# Altium PCB servo.PcbDoc
Units mil, origin at the board's own origin, x right, y up, seen from the top; angles counter-clockwise.
Board outline 1401.57 x 1050 mil, 4 copper layers (Top, Layer 2, Layer 3, Bottom), stack 23.712 mil thick; 86 components, 40 nets, 237 pads, 71 vias.
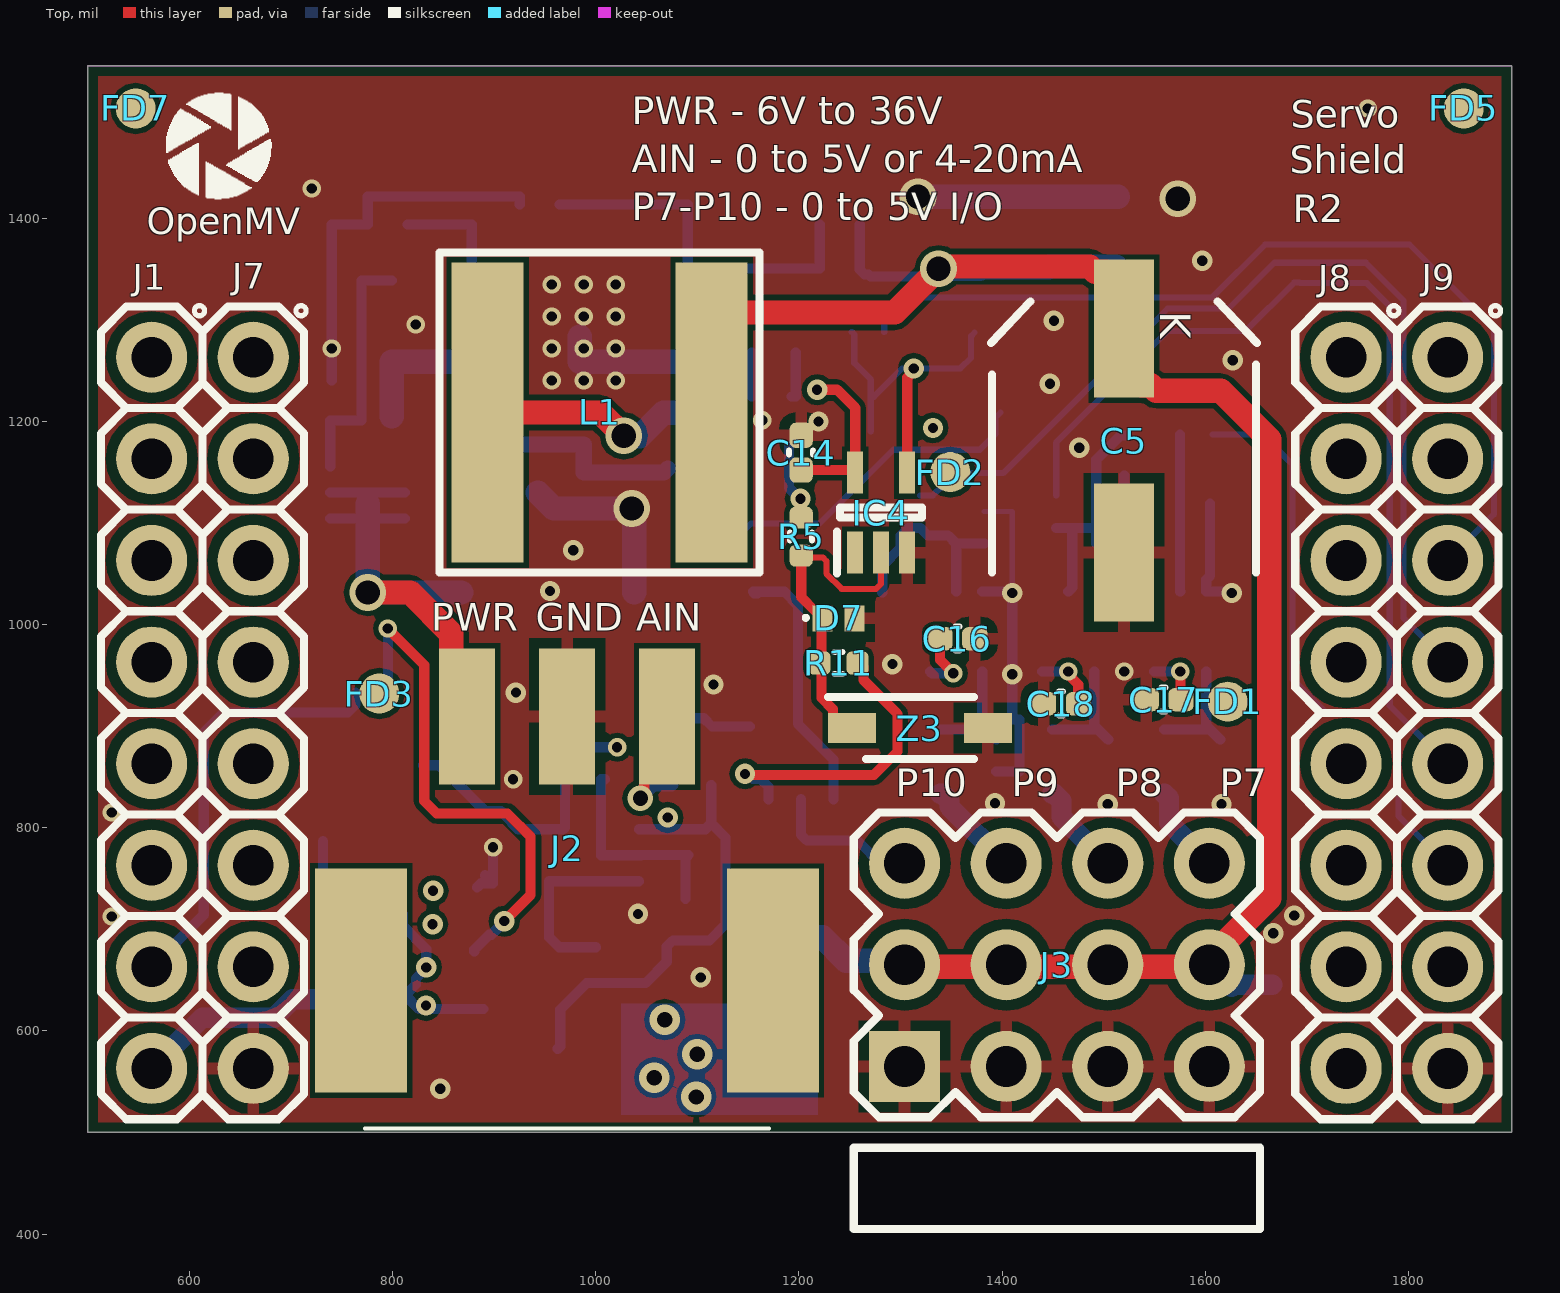
[diagram p0: Top view]
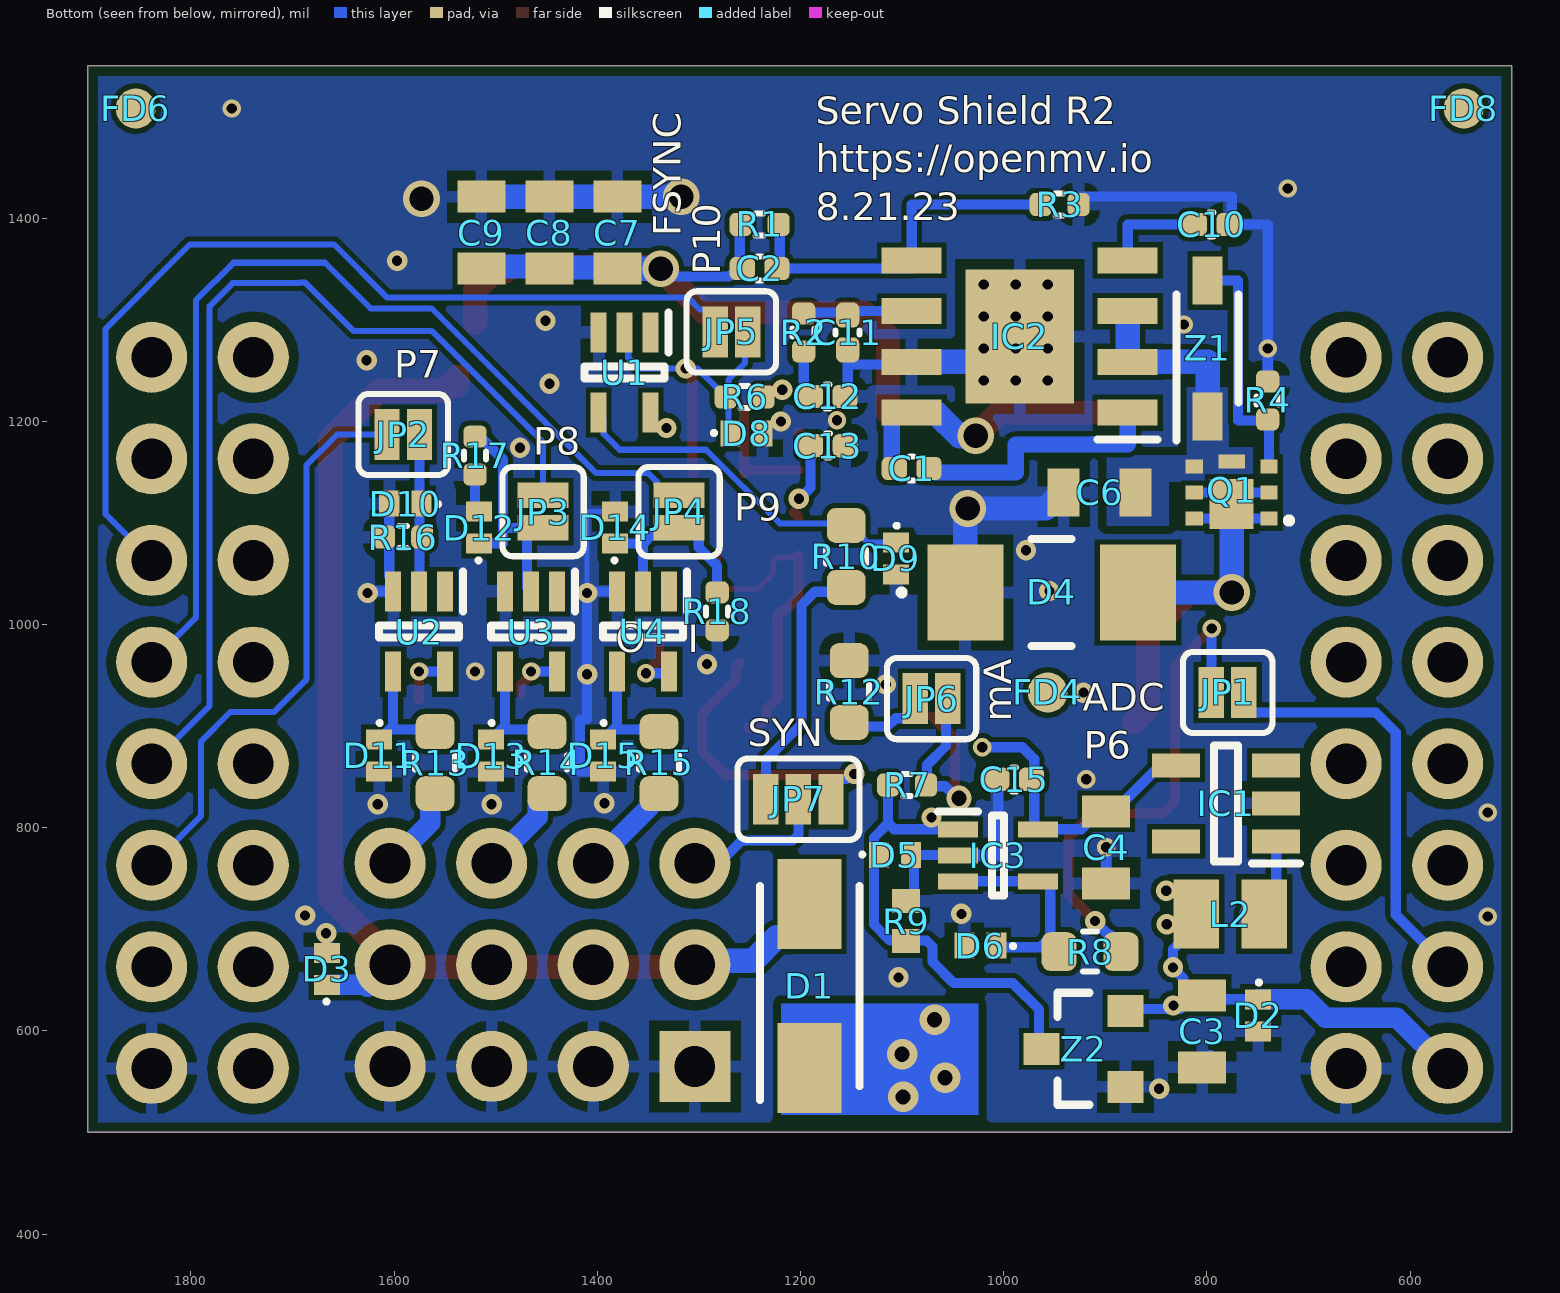
[diagram p1: Bottom view, seen from below]
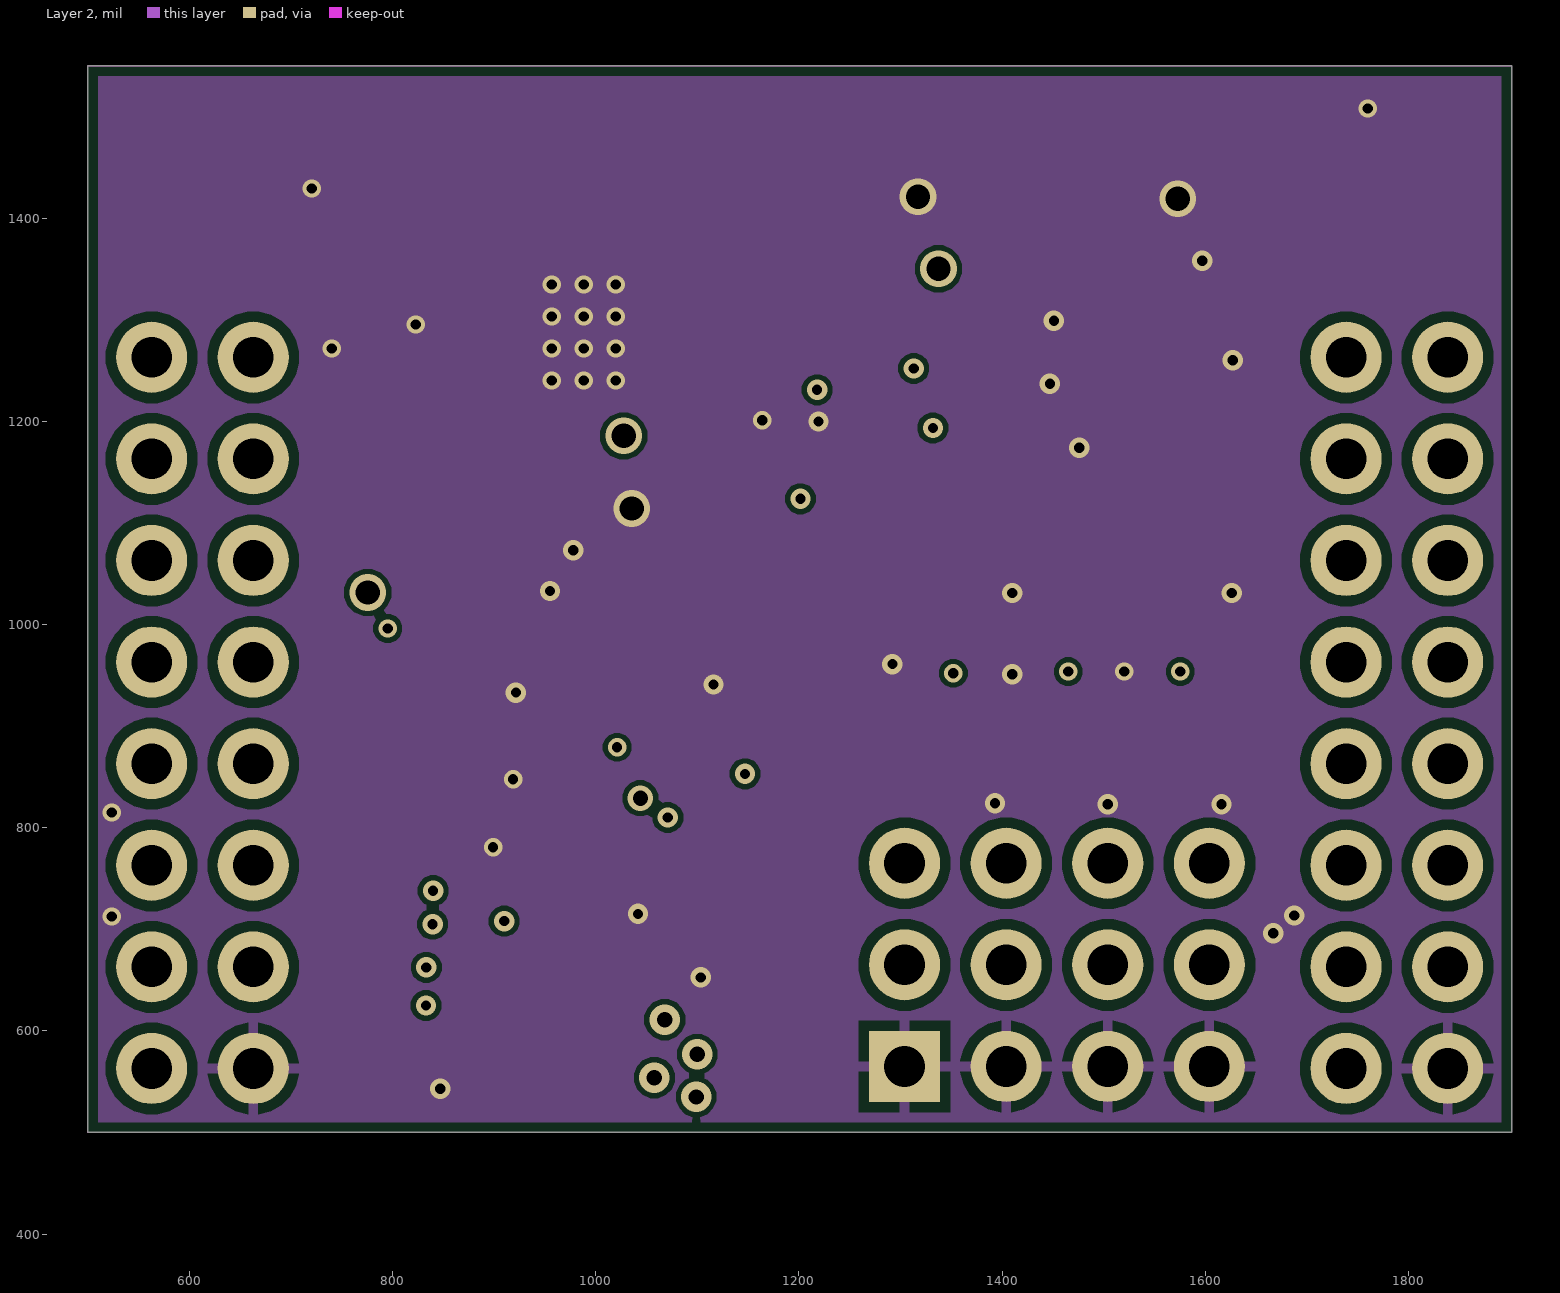
[diagram p2: Layer 2]
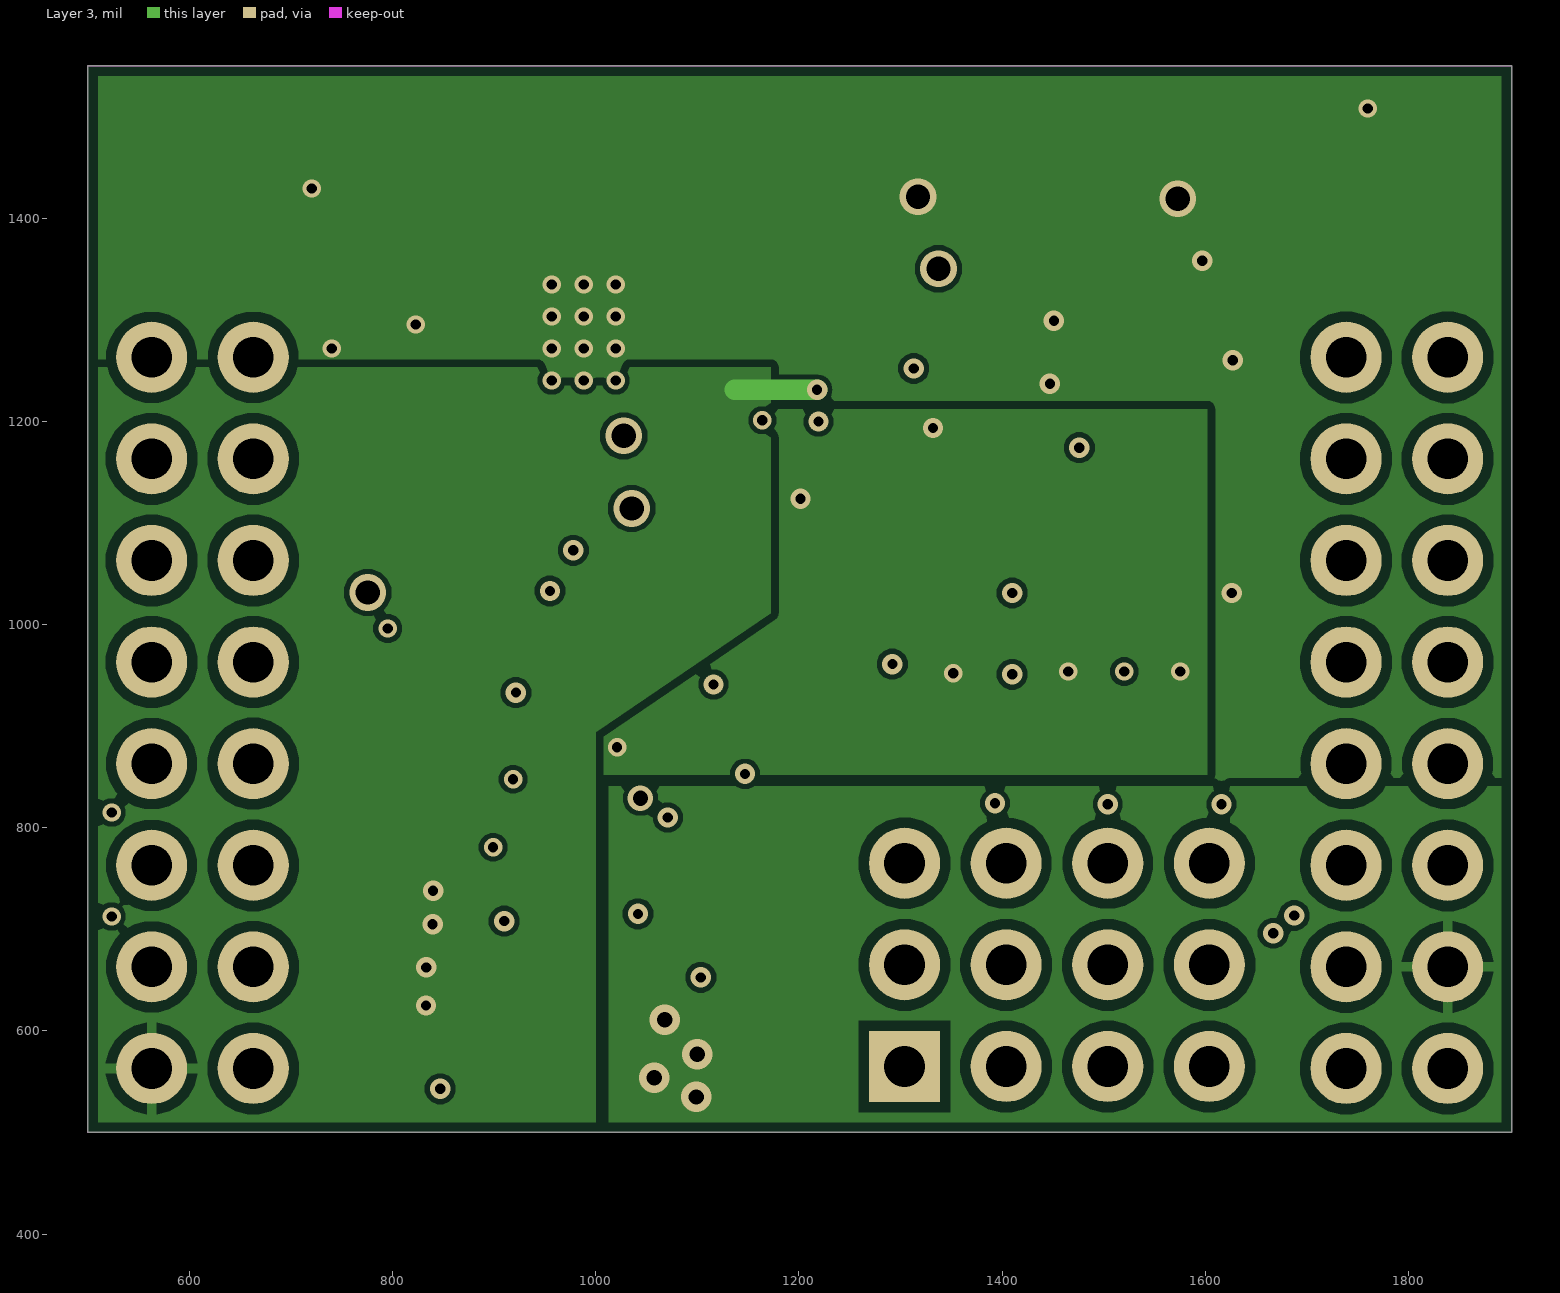
[diagram p3: Layer 3]
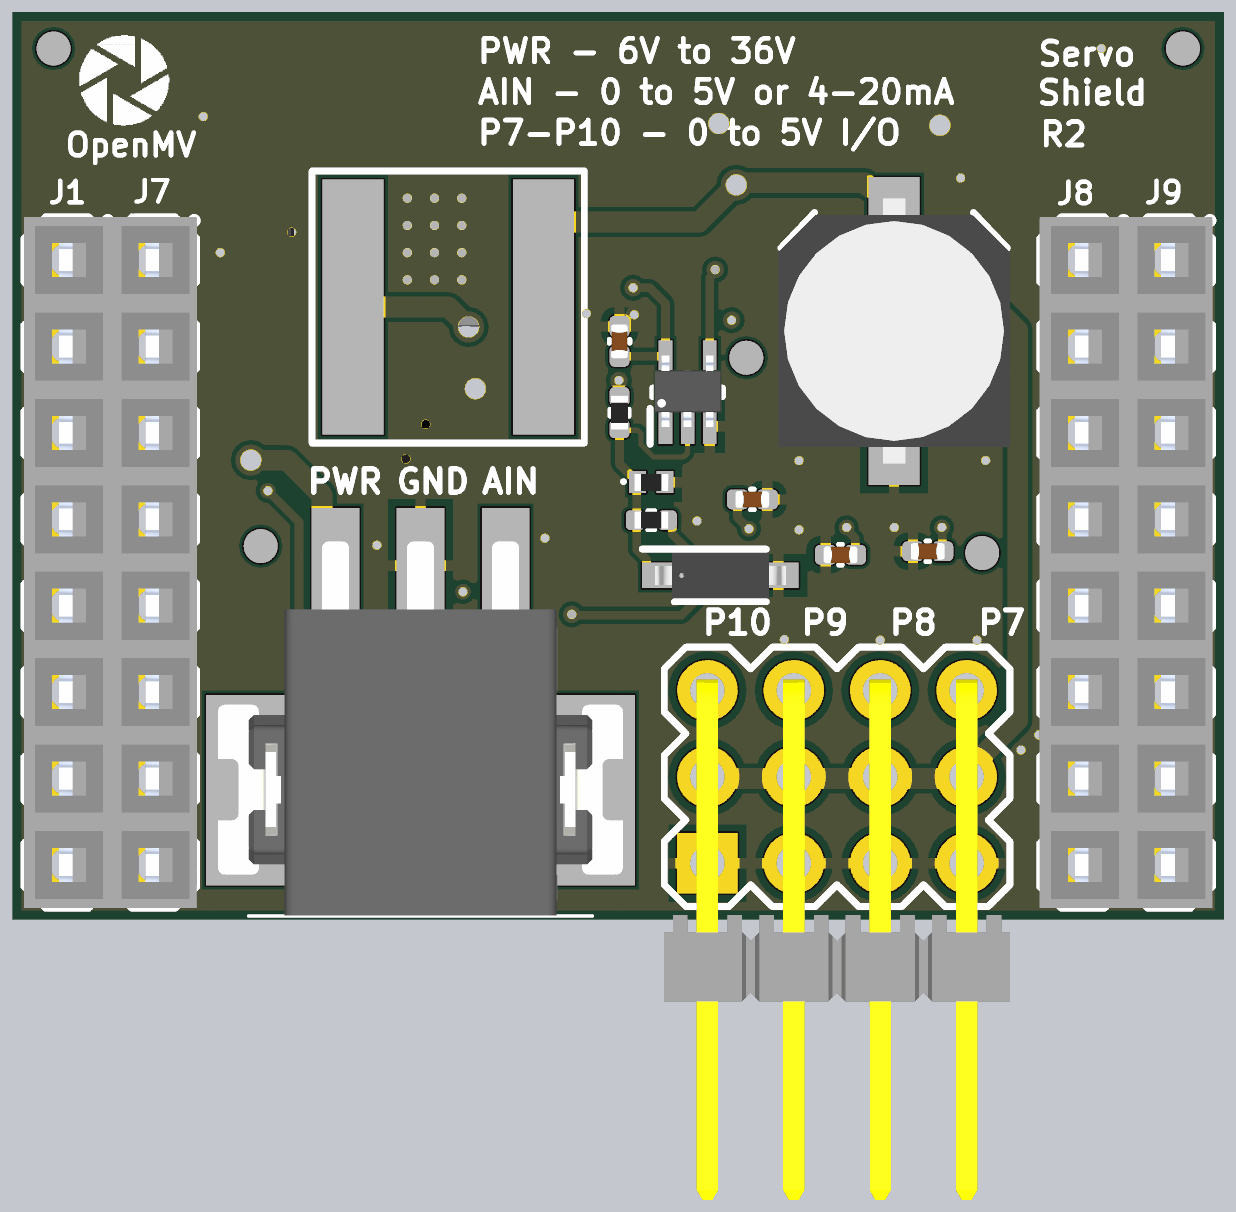
[diagram p4: 3D render of the assembled board from above, using the file's embedded part models]
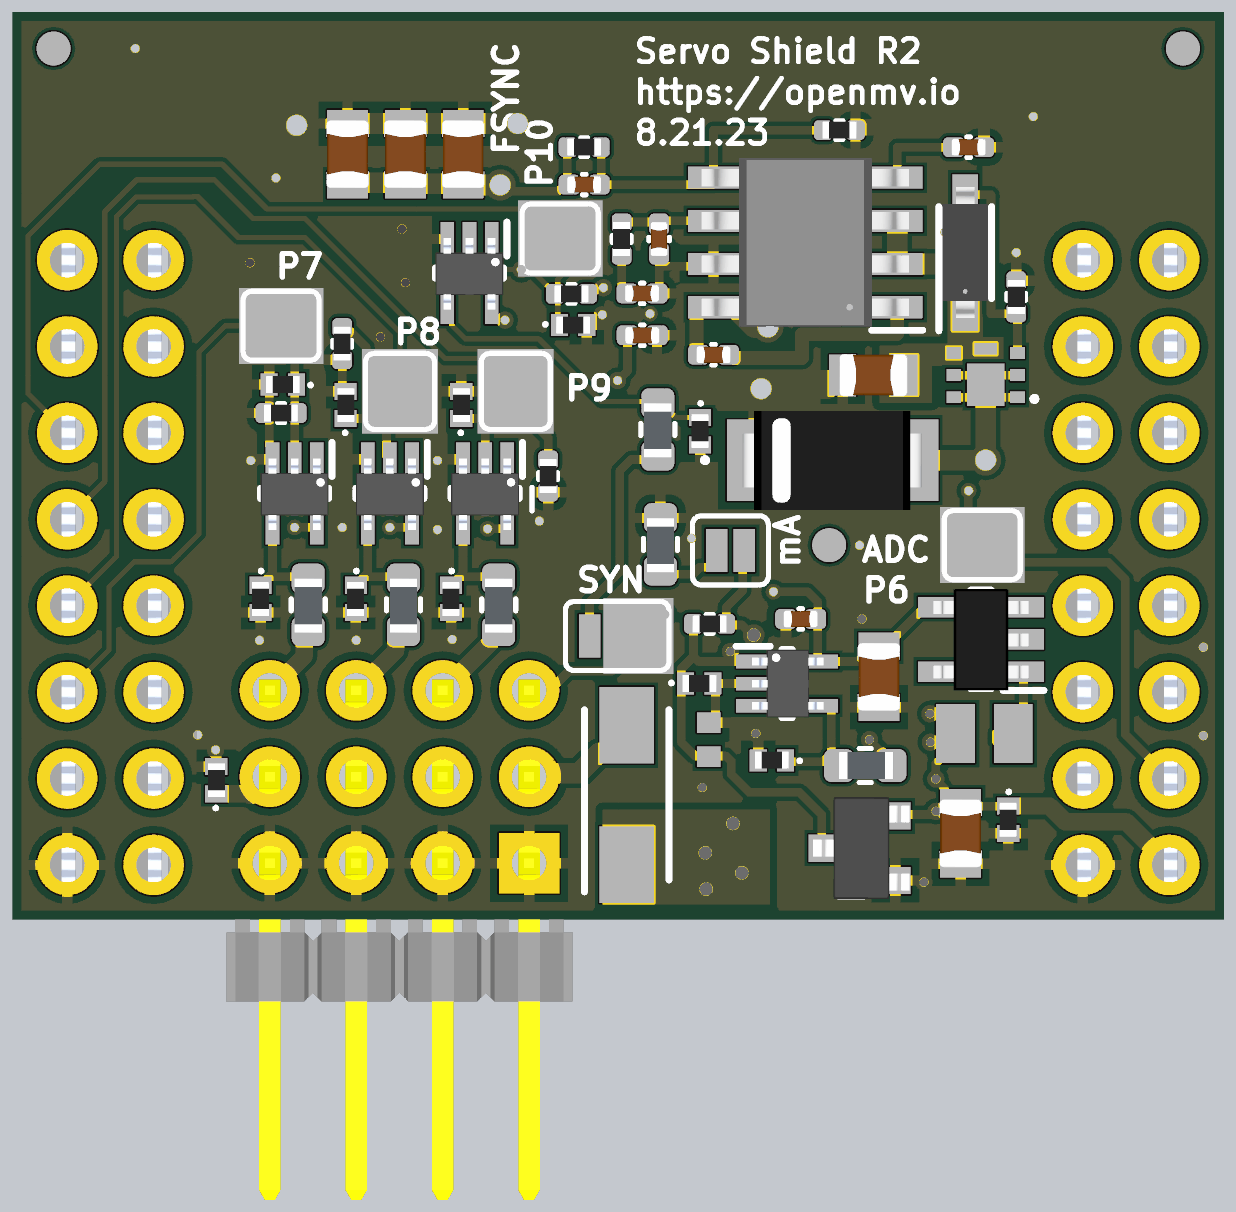
[diagram p5: 3D render of the assembled board from below, using the file's embedded part models]

## Layer stack, top to bottom
Top Solder: solder mask 0.4, Solder Resist, Dk 3.5
Top: signal copper 1.378
Dielectric 2: prepreg 2.8, PP-006, Dk 4.1
Layer 2: signal copper 1.378
Dielectric 1: dielectric 12.6, FR-4, Dk 4.8
Layer 3: signal copper 1.378
Dielectric 3: prepreg 2.8, PP-006, Dk 4.1
Bottom: signal copper 1.378
Bottom Solder: solder mask 0.4, Solder Resist, Dk 3.5

## Board outline
500,1550 500,500 1901.57,500 1901.57,1550

## Design rules (kind name [scope] priority, off if disabled: settings)
BoardOutlineClearance mdCopperDimension [All] p1: gap=10 ignorepadtopadclearanceinfootprint=FALSE except(0: Arc-SplitContinuation Track-SplitContinuation SMDPad-SplitContinuation THPad-SplitContinuation Via-SplitContinuation Fill-SplitContinuation Poly-SplitContinuation Region-SplitContinuation Text-SplitContinuation)
Clearance [All] p1: gap=5 ignorepadtopadclearanceinfootprint=FALSE except(8: Fill-Fill Fill-Poly Fill-Region Poly-Poly Poly-Region Region-Region; 10: THPad-Fill THPad-Poly THPad-Region)
ComponentClearance [All] p1: gap=5 collisioncheckmode=3 verticalgap=10 showdistances=FALSE
HoleSize HoleSize_For_NetClass_hipwr [InNetClass('hipwr')] p1: absolutevalues=TRUE maxlimit=10 minlimit=10 maxpercent=80.000 minpercent=20.000
HoleSize HoleSize_For_NetClass_signal [InNetClass('signal')] p2: absolutevalues=TRUE maxlimit=10 minlimit=10 maxpercent=80.000 minpercent=20.000
HoleSize HoleSize_For_NetClass_pwr [InNetClass('pwr')] p3: absolutevalues=TRUE maxlimit=10 minlimit=10 maxpercent=80.000 minpercent=20.000
HoleSize HoleSize_For_NetClass_gnd [InNetClass('gnd')] p4: absolutevalues=TRUE maxlimit=10 minlimit=10 maxpercent=80.000 minpercent=20.000
HoleSize [All] p5: absolutevalues=TRUE maxlimit=100000 minlimit=10 maxpercent=80.000 minpercent=20.000
HoleToHoleClearance mdDrill [All] p1: gap=10 allowstackedmicrovias=TRUE
MinimumSolderMaskSliver [All] p1 off: minsoldermaskwidth=10
PasteMaskExpansion Expansion_SMDPaste_OFF [InPadClass('SMDPaste_OFF')] p1: expansion=0
PasteMaskExpansion mlMinCreamFrame [All] p2: expansion=0
PolygonConnect PolygonConnect_For_PolygonThermal_ON_Width100000_Gap100000 [InPolygonClass('PolygonThermal_ON_Width100000_Gap100000') vs Not IsVia] p1: connectstyle=Relief reliefconductorwidth=10 reliefentries=4 polygonreliefangle="90 Angle" airgapwidth=10
PolygonConnect PolygonConnect_For_PolygonThermal_OFF [InPolygonClass('PolygonThermal_OFF')] p2: connectstyle=Direct reliefconductorwidth=10 reliefentries=4 polygonreliefangle="90 Angle" airgapwidth=10
PolygonConnect PolygonConnect_For_PolygonThermal_ON_Width120000_Gap100000 [InPolygonClass('PolygonThermal_ON_Width120000_Gap100000') vs Not IsVia] p3: connectstyle=Relief reliefconductorwidth=12 reliefentries=4 polygonreliefangle="90 Angle" airgapwidth=10
PolygonConnect ThermalVias [IsVia] p4: connectstyle=Direct reliefconductorwidth=10 reliefentries=4 polygonreliefangle="90 Angle" airgapwidth=10
PolygonConnect [All] p5: connectstyle=Relief reliefconductorwidth=10 reliefentries=4 polygonreliefangle="90 Angle" airgapwidth=10
RoutingVias [All] p1: holewidth=10 width=18 viastyle="Through Hole" minholewidth=10 minwidth=18 maxholewidth=100 maxwidth=100
SolderMaskExpansion mlMinStopFrame [All] p1: expansion=2 istentingtop=FALSE
Width [All] p1: maxlimit=200 minlimit=5 preferedwidth=5
25 further rules are at their usual default settings.

## Classes and differential pairs
polygon class PolygonThermal_OFF: Polygon_1_Net_EXT_VIN_INT
polygon class PolygonThermal_ON_Width120000_Gap100000: Polygon_1_Net_GND Polygon_2_Net_GND
polygon class Isolate_6: Polygon_1_Net_EXT_VIN_INT Polygon_1_Net_GND Polygon_2_Net_GND
pad class SMDPaste_OFF: FD1-1 FD3-1 FD4-1 FD5-1 FD6-1 FD7-1 FD8-1 JP1-1 JP1-2 JP2-1 JP2-2 JP3-1 JP3-2 JP4-1 JP4-2 JP5-1 JP5-2 JP6-1 JP6-2 JP7-1 JP7-2 JP7-3

## Components (designator, comment, footprint, x,y, rotation, side; value= is the part's Value field where it differs from the comment)
C1 "0.1uF" 0402-CAP 1090.55,1153.54 r180 bottom
C2 "100pF" 0402-CAP 1240.16,1350.39 r180 bottom
C3 "22uF" 0805-CAP 804.58,599.61 r90 bottom
C4 "22uF" 0805-CAP 899.07,780.72 r90 bottom
C5 "EDK227M010A9HAA" CAPAE660X800N 1520,1181 r270 top
C6 "10uF" C0805 905.51,1129.92 r0 bottom
C7 "22uF" 0805-CAP 1380.24,1385.65 r270 bottom
C8 "22uF" 0805-CAP 1447.17,1385.65 r270 bottom
C9 "22uF" 0805-CAP 1514.1,1385.65 r270 bottom
C10 "10nF" 0402-CAP 795.28,1393.7 r180 bottom
C11 "33pF" 0402-CAP 1153.54,1287.4 r270 bottom
C12 "2.7nF" 0402-CAP 1173.23,1224.41 r180 bottom
C13 "0.1uF" 0402-CAP 1173,1176 r0 bottom
C14 "0.1uF" 0402-CAP 1202.26,1169.05 r270 top
C15 "0.1uF" 0402-CAP 989.62,847.65 r180 bottom
C16 "0.1uF" 0402-CAP 1356,986 r180 top
C17 "0.1uF" 0402-CAP 1559,926 r0 top
C18 "0.1uF" 0402-CAP 1458,922 r0 top
D1 "FM240A" DIOM5025X231N 1191,644 r90 bottom
D2 "CPDQT5V0HE-HF" CPDQT5V0HEHF 749.46,615.36 r270 bottom
D3 "CPDQT5V0HE-HF" CPDQT5V0HEHF 1666,661 r90 bottom
D4 "SMAJ40CAE3_TR13" SMAJ40CAE3TR13 952.76,1031.5 r180 bottom
D5 "CPDQT5V0HE-HF" CPDQT5V0HEHF 1107,773 r180 bottom
D6 "CPDQT5V0HE-HF" CPDQT5V0HEHF 1023,684 r0 bottom
D7 "CPDQT5V0HE-HF" CPDQT5V0HEHF 1239,1006 r0 top
D8 "CPDQT5V0HE-HF" CPDQT5V0HEHF 1253,1188 r180 bottom
D9 "CPDQT5V0HE-HF" CPDQT5V0HEHF 1106,1065 r270 bottom
D10 "CPDQT5V0HE-HF" CPDQT5V0HEHF 1589,1119 r0 bottom
D11 "CPDQT5V0HE-HF" CPDQT5V0HEHF 1614.72,870.95 r270 bottom
D12 "CPDQT5V0HE-HF" CPDQT5V0HEHF 1516.3,1095.36 r90 bottom
D13 "CPDQT5V0HE-HF" CPDQT5V0HEHF 1504.49,870.95 r270 bottom
D14 "CPDQT5V0HE-HF" CPDQT5V0HEHF 1382.44,1095.36 r90 bottom
D15 "CPDQT5V0HE-HF" CPDQT5V0HEHF 1394.25,870.95 r270 bottom
FD1 "FIDUCIAL1X2" FIDUCIAL-1X2 1622,924 r0 top
FD2 "FIDUCIAL1X2" FIDUCIAL-1X2 1349,1150 r0 top
FD3 "FIDUCIAL1X2" FIDUCIAL-1X2 787,932 r0 top
FD4 "FIDUCIAL1X2" FIDUCIAL-1X2 956.69,933.07 r180 bottom
FD5 "FIDUCIAL1X2" FIDUCIAL-1X2 1854.33,1507.87 r0 top
FD6 "FIDUCIAL1X2" FIDUCIAL-1X2 1854.33,1507.87 r180 bottom
FD7 "FIDUCIAL1X2" FIDUCIAL-1X2 547.24,1507.87 r0 top
FD8 "FIDUCIAL1X2" FIDUCIAL-1X2 547.24,1507.87 r180 bottom
IC1 "TPS613222ADBVR" SOT95P280X145-5N 780.96,824.02 r0 bottom
IC2 "AP64501SP-13" SOIC127P600X163-9N 984.25,1283.46 r0 bottom
IC3 "LM321LVIDCKR" SOT65P210X110-5N 1005.37,772.84 r180 bottom
IC4 "74LVC1G07GW,125" SOT65P212X110-5N 1281,1110 r90 top
J1 "SSQ-108-03-T-S" HDR_1X8 562.99,1262.99 r0 top
J2 "1771033" 1771033 971.94,909.45 r0 top
J3 "HDR 3x3" TSW-104-08-T-T-RA 1304,565 r0 top
J7 "SSQ-108-03-T-S" HDR_1X8 662.99,1262.99 r0 top
J8 "SSQ-108-03-T-S" HDR_1X8 1738.58,1262.99 r0 top
J9 "SSQ-108-03-T-S" HDR_1X8 1838.58,1262.99 r0 top
JP1 "JUMPER-SMT_2_NC_PASTE_SILK" SMT-JUMPER_2_NC_PASTE_SILK 779.53,933.07 r0 bottom
JP2 "JUMPER-SMT_2_NC_PASTE_SILK" SMT-JUMPER_2_NC_PASTE_SILK 1591,1187 r180 bottom
JP3 "JUMPER-SMT_2_NC_PASTE_SILK" SMT-JUMPER_2_NC_PASTE_SILK 1453.31,1111.11 r270 bottom
JP4 "JUMPER-SMT_2_NC_PASTE_SILK" SMT-JUMPER_2_NC_PASTE_SILK 1319.45,1111.11 r270 bottom
JP5 "JUMPER-SMT_2_NC_PASTE_SILK" SMT-JUMPER_2_NC_PASTE_SILK 1268,1288 r180 bottom
JP6 "JUMPER-SMT_2_NO_SILK" SMT-JUMPER_2_NO_SILK 1071,927 r180 bottom
JP7 "JUMPER-SMT_3_1-NC_PASTE_SILK" SMT-JUMPER_3_1-NC_PASTE_SILK 1202,828 r180 bottom
L1 "NR8040T3R6N" NR8040T3R6N 1003.94,1208.66 r0 top
L2 "MAKK2016T2R2M" INDC2016X100N 777,715 r180 bottom
Q1 "BUK6D120-60PX" BUK6D12060PX 775.59,1129.92 r180 bottom
R1 "133K" 0402-RES 1240.16,1393.7 r180 bottom
R2 "15.8K" 0402-RES 1196.85,1287.4 r270 bottom
R3 "22.1K" 0402-RES 944.88,1413.39 r180 bottom
R4 "100K" 0402-RES 740.16,1220.47 r90 bottom
R5 "100K" 0402-RES 1202.26,1086.38 r270 top
R6 "100K" 0402-RES 1255,1224 r0 bottom
R7 "51K" 0402-RES 1095,842 r180 bottom
R8 "470" R0603 914,678 r180 bottom
R9 "100K" 0402 1096,708 r90 bottom
R10 "470" R0603 1155,1066 r270 bottom
R11 "10K" 0402-RES 1239,962 r0 top
R12 "240" R0603 1152,933 r270 bottom
R13 "470" R0603 1559.61,863.08 r270 bottom
R14 "470" R0603 1449.37,863.08 r270 bottom
R15 "470" R0603 1339.13,863.08 r270 bottom
R16 "100K" 0402-RES 1591,1086 r0 bottom
R17 "100K" 0402-RES 1520.24,1166.23 r270 bottom
R18 "100K" 0402-RES 1282,1013 r270 bottom
U1 "74LVC1G17SE-7" SOT65P210X110-5N 1373,1248 r270 bottom
U2 "74LVC1G17SE-7" SOT65P210X110-5N 1575.35,993 r270 bottom
U3 "74LVC1G17SE-7" SOT65P210X110-5N 1465.12,993 r270 bottom
U4 "74LVC1G17SE-7" SOT65P210X110-5N 1354.88,993 r270 bottom
Z1 "MMSZ5231B-7-F" SOD3716X145N 799.21,1271.65 r90 bottom
Z2 "BAT54S_R1_00001" SOT23-3 919.37,582.4 r90 bottom
Z3 "MMSZ5231B-7-F" SOD3716X145N 1319,898 r0 top

## Footprints (in the part's own frame and the unit in brackets; to place one, negate y for a bottom-side part, rotate by r counter-clockwise, add the part's x,y. Pads: shape width x height; smd on the part's side, far side on the other; paste and mask are expansions set on the pad)
0402 [mil] "0402"
  rect 23.62x27.56 smd: 1(-19.69,0) 2(19.69,0)
0402-CAP [mm] "0402-CAP"
  rrect52% 0.63x0.58 smd mask+0.05: 1(-0.435,0) 2(0.435,0)
  silkscreen extent -0.05,-0.3 0.05,0.3, body extent -0.5,-0.25 0.5,0.25, height 0.5
0402-RES [mm] "0402-RES"
  rrect51% 0.55x0.58 smd mask+0.05: 1(-0.475,0) 2(0.475,0)
  silkscreen extent -0.1,-0.28 0.1,0.28, body extent -0.5,-0.25 0.5,0.25, height 0.34
0805-CAP [mil] "0805"
  rect 31.5x47.24 smd: 1(-35.43,0) 2(35.43,0)
  body extent -39,-25 39,25, height 49
1771033 [mil] "1771033"
  rect 55.12x133.86 smd: 1(-98.43,0) 2(0,0) 3(98.43,0)
  rect 90.55x220.47 smd: 4(-202.76,-259.84) 5(202.76,-259.84)
  silkscreen extent -199,-406 199,-406, body extent -234,-405 234,28, height 202
BUK6D12060PX [mm] "BUK6D12060PX"
  rect 0.43x0.35 smd mask+0.051: 1(0.935,-0.65) 2(0.935,0) 3(0.935,0.65) 4(-0.935,0.65) 5(-0.935,0) 6(-0.935,-0.65)
  rect 1.1x1.25 smd mask+0.051: 7(0,-0.285)
  rect 0.66x0.35 smd mask+0.051: 8(0,0.775)
  silkscreen extent 1.38,-0.75 1.48,-0.65, body extent -1.14,-0.89 1.14,1.02, height 0.5
C0805 [mil] "C0805"
  rect 31.5x47.24 smd: 1(-35.43,0) 2(35.43,0)
  body extent -39,-25 39,25, height 49
CAPAE660X800N [mm] "CAPAE660X800N"
  rect 3.45x1.5 smd: 1(-2.8,0) 2(2.8,0)
  silkscreen extent -3.48,-3.33 3.3,3.33, body extent -3.9,-3.4 3.9,3.4, height 8.05
CPDQT5V0HEHF [mm] "CPDQT5V0HEHF"
  rect 0.5x0.65 smd: 1(-0.4,0) 2(0.4,0)
  silkscreen extent -0.87,-0.03 -0.77,0.07, body extent -0.5,-0.25 0.5,0.25, height 0.34
DIOM5025X231N [mil] "DIOM5025X231N"
  rect 88.58x62.99 smd: 1(-80.71,0) 2(80.71,0)
  silkscreen extent -112,-49 98,49, body extent -89,-48 89,50, height 79
FIDUCIAL-1X2 [mm] "FIDUCIAL-1X2"
  rrect100% 1x1 smd paste+0: 1(0,0)
HDR_1X8 [mil]
  round 70 hole 40: 1(0,0) 2(0,-100) 3(0,-200) 4(0,-300) 5(0,-400) 6(0,-500) 7(0,-600) 8(0,-700)
  silkscreen extent -50,-750 52,51, body extent -50,-750 50,50, height 335
INDC2016X100N [mm] "INDC2016X100N"
  rect 1.14x1.73 smd: 1(-0.847,0) 2(0.847,0)
  body extent -1,-0.8 1,0.8, height 1
NR8040T3R6N [mil] "NR8040T3R6N"
  rect 70.87x295.28 smd: 1(-110.24,0) 2(110.24,0)
  silkscreen extent -157,-157 157,157, body extent -157,-157 157,157, height 157
R0603 [mm] "R0603"
  rrect51% 0.87x0.97 smd mask+0.05: 1(-0.8,0) 2(0.75,0)
  silkscreen extent -0.2,-0.5 0.15,0.5, body extent -0.8,-0.4 0.8,0.4, height 0.45
SMAJ40CAE3TR13 [mm] "SMAJ40CAE3TR13"
  rect 1.9x2.39 smd: 1(-2.16,0) 2(2.16,0)
  silkscreen extent -3.8,-1.34 0.5,1.34, body extent -2.65,-1.47 2.63,1.45, height 2.41
SMT-JUMPER_2_NC_PASTE_SILK [mil] "SMT-JUMPER_2_NC_PASTE_SILK"
  rect 25x50 smd paste+0: 1(-16,0) 2(16,0)
  silkscreen extent -44,-40 44,40
SMT-JUMPER_2_NO_SILK [mil] "SMT-JUMPER_2_NO_SILK"
  rect 25x50 smd paste+0: 1(-16,0) 2(16,0)
  silkscreen extent -44,-40 44,40
SMT-JUMPER_3_1-NC_PASTE_SILK [mil] "SMT-JUMPER_3_1-NC_PASTE_SILK"
  rect 25x50 smd paste+0: 1(-32,0) 2(0,0) 3(32,0)
  silkscreen extent -60,-40 60,40
SOD3716X145N [mil] "SOD3716X145N"
  rect 47.24x29.53 smd: 1(-66.93,0) 2(66.93,0)
  silkscreen extent -91,-31 53,31, body extent -76,-27 76,27, height 32
SOIC127P600X163-9N [mm] "SOIC127P600X163-9N"
  rect 1.5x0.65 smd: 1(-2.7,1.905) 2(-2.7,0.635) 3(-2.7,-0.635) 4(-2.7,-1.905) 5(2.7,-1.905) 6(2.7,-0.635) 7(2.7,0.635) 8(2.7,1.905)
  rect 2.71x3.35 smd: 9(0,0)
  silkscreen extent -3.45,2.58 -1.95,2.58, body extent -3.05,-2.48 3.05,2.48, height 1.63
SOT23-3 [mil] "SOT23-3"
  rect 31.5x35.43 smd: 1(-37.4,-39.37) 2(37.4,-39.37) 3(0,43.31)
  silkscreen extent -55,-4 55,28, body extent -59,-56 59,56, height 47
SOT65P210X110-5N [mm] "SOT65P210X110-5N"
  rect 1x0.4 smd: 1(-1,0.65) 2(-1,0) 3(-1,-0.65) 4(1,-0.65) 5(1,0.65)
  silkscreen extent -1.5,-1 0.15,1.1, body extent -1.02,-1 1.07,1, height 0.96
SOT65P212X110-5N [mm] "SOT65P212X110-5N"
  rect 1.05x0.4 smd: 1(-1,0.65) 2(-1,0) 3(-1,-0.65) 4(1,-0.65) 5(1,0.65)
  silkscreen extent -1.53,-1.02 0.12,1.1, body extent -1.02,-1 1.07,1, height 0.96
SOT95P280X145-5N [mil] "SOT95P280X145-5N"
  rect 47.24x23.62 smd: 1(-49.21,37.4) 2(-49.21,0) 3(-49.21,-37.4) 4(49.21,-37.4) 5(49.21,37.4)
  silkscreen extent -73,-57 12,59, body extent -55,-59 55,59, height 46
TSW-104-08-T-T-RA [mil] "1X03"
  rect 70x70 hole 40: 1(0,0)
  round 70 hole 40: 2(0,100) 3(0,200) 4(100,0) 5(100,100) 6(100,200) 7(200,0) 8(200,100) 9(200,200) 10(300,0) 11(300,100) 12(300,200)
  silkscreen extent -50,-160 350,250, body extent -50,-390 350,213, height 320

## Part data
C1 C13 C14 C15 C16 C17 C18: library part CAP_0402, "0402 (1005 Metric) Nick Garner - TeleSense", MPN=GRM155R71H104KE14D, DeviceSetName=CAP_0402, GateName_1=G$1, LibraryName=0402, SymbolName_1=CAP
C2: library part CAP_0402, "0402 (1005 Metric) Nick Garner - TeleSense", MPN=CC0402JRNPO9BN101, DeviceSetName=CAP_0402, GateName_1=G$1, LibraryName=0402, SymbolName_1=CAP
C3 C4 C7 C8 C9: library part 22UF-0805-6.3V-20%, "22ÂµF ceramic capacitors    A capacitor is a passive two-terminal electrical component used to store electrical energy temporarily in an electric field.", MPN=CL21A226MQQNNNE, DeviceName=-0805-6.3V-20%, DeviceSetName=22UF, GateName_1=G$1, LibraryName=SparkFun-Capacitors, PROD_ID=CAP-08402, SymbolName_1=CAP
C5: "EDK, Aluminum, Aluminum Electrolytic, 220 uF, 20%, 10 VDC, -40/+85C, 85C, -40C, 85C, 2,000 Hrs, 26 % , 0.25, 22 uA, 3, 6, 6.3mm, 7.7mm, 1000   Source:  Datasheet", MANUFACTURER_NAME=KEMET, DeviceSetName=EDK227M010A9HAA, GateName_1=G$1, HEIGHT=8mm, LibraryName=EDK227M010A9HAA, MANUFACTURER_PART_NUMBER=EDK227M010A9HAA, MOUSER_PART_NUMBER=80-EDK227M010A9HAA, MOUSER_PRICE-STOCK=https://www.mouser.co.uk/ProductDetail/KEMET/EDK227M010A9HAA?qs=E9QF1UCAUX64XuBtcKp6BA%3D%3D, MPN=EDK227M010A9HAA, SymbolName_1=EDK227M010A9HAA
C6: library part C-EUC0805, "CAPACITOR, European symbol", MPN=GRM21BR61H106KE43K, DeviceName=C0805, DeviceSetName=C-EU, GateName_1=G$1, LibraryName=rcl, POPULARITY=88, SPICEPREFIX=C, SymbolName_1=C-EU
C10: library part CAP_0402, "0402 (1005 Metric) Nick Garner - TeleSense", MPN=CL05B103KB5NNNC, DeviceSetName=CAP_0402, GateName_1=G$1, LibraryName=0402, SymbolName_1=CAP
C11: library part CAP_0402, "0402 (1005 Metric) Nick Garner - TeleSense", MPN=04025A330JAT2A, DeviceSetName=CAP_0402, GateName_1=G$1, LibraryName=0402, SymbolName_1=CAP
C12: library part CAP_0402, "0402 (1005 Metric) Nick Garner - TeleSense", MPN=GCM155R71H272KA37J, DeviceSetName=CAP_0402, GateName_1=G$1, LibraryName=0402, SymbolName_1=CAP
D1: "Diodes - General Purpose, Power, Switching GP Si Rectifier SMB,2A,40V   Source:  Datasheet", MANUFACTURER_NAME=Rectron, DeviceSetName=FM240A, GateName_1=G$1, HEIGHT=2.31mm, LibraryName=FM240A, MANUFACTURER_PART_NUMBER=FM240A, MOUSER_PART_NUMBER=583-FM240A, MOUSER_PRICE-STOCK=https://www.mouser.co.uk/ProductDetail/Rectron/FM240A?qs=7pEAo90IqNG7sknZwmLYhQ%3D%3D, MPN=FM240A, SymbolName_1=FM240A
D2 D3 D5 D6 D7 D8 D9 D10 D11 D12 D13 D14 D15: "ESD Suppressors / TVS Diodes DIODE ESD 5VWM 65W 0402/SOD-923F   Source:  Datasheet", MANUFACTURER_NAME="Comchip Technology", DeviceSetName=CPDQT5V0HE-HF, GateName_1=G$1, HEIGHT=0.42mm, LibraryName=CPDQT5V0HE-HF, MANUFACTURER_PART_NUMBER=CPDQT5V0HE-HF, MOUSER_PART_NUMBER=MOUSER_PART_NUMBER, MOUSER_PRICE-STOCK=MOUSER_PRICE-STOCK, MPN=CPDQT5V0HE-HF, SymbolName_1=CPDQT5V0HE-HF
D4: "ESD Suppressors / TVS Diodes TVS   Source:  Datasheet", MANUFACTURER_NAME=Microchip, MANUFACTURER_PART_NUMBER=SMAJ40CAe3/TR13, DeviceSetName=SMAJ40CAE3_TR13, GateName_1=G$1, HEIGHT=3.05mm, LibraryName=SMAJ40CAe3_TR13, MOUSER_PART_NUMBER=494-SMAJ40CAE3/TR13, MOUSER_PRICE-STOCK=https://www.mouser.co.uk/ProductDetail/Microchip-Technology/SMAJ40CAe3-TR13?qs=pU29NIZ4ZwCw3PnlxOleOw%3D%3D, MPN=SMAJ40CAe3/TR13, SymbolName_1=SMAJ40CAE3_TR13
FD1 FD2 FD3 FD4 FD5 FD6 FD7 FD8: "Fiducial Alignment Points    Point-of-reference for pick-and-place machines and other optical instruments.", DeviceName=1X2, DeviceSetName=FIDUCIAL, GateName_1=G$1, LibraryName=SparkFun-Aesthetics, SymbolName_1=FIDUCIAL
IC1: "6-uA Quiescent Current, 1.8-A Switch Current Boost Converter   Source:  Datasheet", MANUFACTURER_NAME="Texas Instruments", DeviceSetName=TPS613222ADBVR, GateName_1=G$1, HEIGHT=1.45mm, LibraryName=TPS613222ADBVR, MANUFACTURER_PART_NUMBER=TPS613222ADBVR, MOUSER_PART_NUMBER=595-TPS613222ADBVR, MOUSER_PRICE-STOCK=https://www.mouser.co.uk/ProductDetail/Texas-Instruments/TPS613222ADBVR?qs=W0yvOO0ixfE4d69WXsn8NQ%3D%3D, MPN=TPS613222ADBVR, SymbolName_1=TPS613222ADBVR
IC2: "Conv DC-DC 3.8V to 40V Synchronous Step Down Single-Out 0.8V to 39V 5A 8-Pin SO EP T/R   Source:  Datasheet", MANUFACTURER_NAME="Diodes Inc.", DeviceSetName=AP64501SP-13, GateName_1=G$1, HEIGHT=1.63mm, LibraryName=AP64501SP-13, MANUFACTURER_PART_NUMBER=AP64501SP-13, MOUSER_PART_NUMBER=621-AP64501SP-13, MOUSER_PRICE-STOCK=https://www.mouser.co.uk/ProductDetail/Diodes-Incorporated/AP64501SP-13?qs=P1JMDcb91o7FS0GU%252BW7TIQ%3D%3D, MPN=AP64501SP-13, SymbolName_1=AP64501SP-13
IC3: "1-Channel industry standard low voltage operational amplifier   Source:  Datasheet", MANUFACTURER_NAME="Texas Instruments", DeviceSetName=LM321LVIDCKR, GateName_1=G$1, HEIGHT=1.1mm, LibraryName=LM321LVIDCKR, MANUFACTURER_PART_NUMBER=LM321LVIDCKR, MOUSER_PART_NUMBER=595-LM321LVIDCKR, MOUSER_PRICE-STOCK=https://www.mouser.co.uk/ProductDetail/Texas-Instruments/LM321LVIDCKR?qs=qSfuJ%252Bfl%2Fd6RcyTOjkRx5Q%3D%3D, MPN=LM321LVIDCKR, SymbolName_1=LM321LVIDCKR
IC4: "74LVC1G07 - Buffer with open-drain output@en-us   Source:  Datasheet", MANUFACTURER_NAME=Nexperia, DeviceSetName=74LVC1G07GW,125, GateName_1=G$1, HEIGHT=1.1mm, LibraryName=74LVC1G07GW_125, MANUFACTURER_PART_NUMBER=74LVC1G07GW,125, MOUSER_PART_NUMBER=771-74LVC1G07GW-G, MOUSER_PRICE-STOCK=https://www.mouser.co.uk/ProductDetail/Nexperia/74LVC1G07GW125?qs=me8TqzrmIYW763Mg%2FG86Uw%3D%3D, MPN=74LVC1G07GW,125, SymbolName_1=74LVC1G07GW,125
J1 J7 J8 J9: library part HDR_1X8, MANUFACTURER P/N=SSQ-108-03-T-S
J2: "PCB terminal block, nominal current: 6 A, rated voltage (III/2): 160 V, nominal cross section: 0.5 mm?, Number of potentials: 3, Number of rows: 1, Number of positions per row: 3, product range: PTSM 0,5/..-H-SMD, pitch: 2.5 mm, connection method: Push-in spring connection, mounting: SMD soldering, conductor/PCB connection direction: 0 ?, color: black, Pin layout: Linear pad geometry, type of packaging: packed in cardboard   Source:  Datasheet", MANUFACTURER_NAME="Phoenix Contact", ARROW_PART_NUMBER=1771033, ARROW_PRICE-STOCK=https://www.arrow.com/en/products/1771033/phoenix-contact?region=nac, DeviceSetName=1771033, GateName_1=G$1, HEIGHT=5.22mm, LibraryName=1771033, MANUFACTURER_PART_NUMBER=1771033, MOUSER_PART_NUMBER=651-1771033, MOUSER_PRICE-STOCK=https://www.mouser.co.uk/ProductDetail/Phoenix-Contact/1771033?qs=Q77YN%2FRrsKK5q5FqaCIZZA%3D%3D, MPN=1771033, SymbolName_1=1771033
J3: library part TSW-104-08-T-T-RA
JP1 JP2 JP3 JP4 JP5: "Normally closed solder jumper    This jumper has an aperture in the stencil to allow solder paste to bridge the split in the wire so it's normally closed (NC). Wick off the solder to open the connection. Reapply solder to reclose the connection.", DeviceName=_SILK, DeviceSetName=JUMPER-SMT_2_NC_PASTE, GateName_1=G$1, LibraryName=SparkFun-Jumpers, SymbolName_1=SMT-JUMPER_2_NC_PASTE
JP6: "Normally open jumper    This jumper has two pads in close proximity to each other. Apply solder to close the connection.   Round pads are easier to solder for beginners, but are a lot larger.   SparkFun Product that uses the round pads:  SparkFun EL Sequencer", DeviceName=_SILK, DeviceSetName=JUMPER-SMT_2_NO, GateName_1=G$1, LibraryName=SparkFun-Jumpers, SymbolName_1=SMT-JUMPER_2_NO
JP7: "Normally closed solder jumper (1 of 2 connections)    This jumper has an aperture in the stencil to allow solder paste to bridge one of the two connections. One connection is normally closed (NC), while the other is normally open (NO). Wick off the solder to open the connection. Reapply solder to reclose the connection. Apply solder to the other side instead to change the current path.", DeviceName=_SILK, DeviceSetName=JUMPER-SMT_3_1-NC_PASTE, GateName_1=G$1, LibraryName=SparkFun-Jumpers, SymbolName_1=SMT-JUMPER_3_1-NC_PASTE
L1: "NR8040T3R6N   Source:  Datasheet", MANUFACTURER_NAME="TAIYO YUDEN", MPN=NRS8040T3R6NJGJ, DeviceSetName=NR8040T3R6N, GateName_1=G$1, HEIGHT=4.2mm, LibraryName=NR8040T3R6N, MANUFACTURER_PART_NUMBER=NR8040T3R6N, MOUSER_PART_NUMBER=963-NR8040T3R6N, MOUSER_PRICE-STOCK=https://www.mouser.co.uk/ProductDetail/Taiyo-Yuden/NR8040T3R6N?qs=PzICbMaShUfIZ5Ej1bVWkg%3D%3D, SymbolName_1=NR8040T3R6N
L2: "INDUCTOR, METAL CORE Check availability", PACKAGE="2016 Taiyo Yuden", AVAILABILITY="In Stock", DeviceSetName=MAKK2016T2R2M, GateName_1=G$1, LibraryName=MAKK2016T2R2M, MF="Taiyo Yuden", MP=MAKK2016T2R2M, MPN=MAKK2016T2R2M, PRICE=None, PURCHASE-URL=https://pricing.snapeda.com/search/part/MAKK2016T2R2M/?ref=eda, SymbolName_1=MAKK2016T2R2M
Q1: "MOSFET 60V P-CH TRENCHMOS SOT1220   Source:  Datasheet", MANUFACTURER_NAME=Nexperia, DeviceSetName=BUK6D120-60PX, GateName_1=G$1, HEIGHT=0.65mm, LibraryName=BUK6D120-60PX, MANUFACTURER_PART_NUMBER=BUK6D120-60PX, MOUSER_PART_NUMBER=771-BUK6D120-60PX, MOUSER_PRICE-STOCK=https://www.mouser.co.uk/ProductDetail/Nexperia/BUK6D120-60PX?qs=F5EMLAvA7IBtoNC2L3hOcQ%3D%3D, MPN=BUK6D120-60PX, SymbolName_1=BUK6D120-60PX
R1: library part RES_0402, "0402 (1005 Metric) Nick Garner - TeleSense", MPN=RC0402FR-07133KL, DeviceSetName=RES_0402, GateName_1=G$1, LibraryName=0402, SymbolName_1=RESISTOR
R2: library part RES_0402, "0402 (1005 Metric) Nick Garner - TeleSense", MPN=AC0402FR-0715K8L, DeviceSetName=RES_0402, GateName_1=G$1, LibraryName=0402, SymbolName_1=RESISTOR
R3: library part RES_0402, "0402 (1005 Metric) Nick Garner - TeleSense", MPN=CR0402-FX-2212GLF, DeviceSetName=RES_0402, GateName_1=G$1, LibraryName=0402, SymbolName_1=RESISTOR
R4 R5 R6 R9 R16 R17 R18: library part RES_0402, "0402 (1005 Metric) Nick Garner - TeleSense", MPN=AC0402FR-07100KL, DeviceSetName=RES_0402, GateName_1=G$1, LibraryName=0402, SymbolName_1=RESISTOR
R7: library part RES_0402, "0402 (1005 Metric) Nick Garner - TeleSense", MPN=RC0402JR-0751KL, DeviceSetName=RES_0402, GateName_1=G$1, LibraryName=0402, SymbolName_1=RESISTOR
R8 R10 R13 R14 R15: library part R-US_R0603, "RESISTOR, American symbol", MPN=CR0603-FX-4700ELF, DeviceName=R0603, DeviceSetName=R-US_, GateName_1=G$1, LibraryName=rcl, POPULARITY=77, SPICEPREFIX=R, SymbolName_1=R-US
R11: library part RES_0402, "0402 (1005 Metric) Nick Garner - TeleSense", MPN=AC0402FR-1310KL, DeviceSetName=RES_0402, GateName_1=G$1, LibraryName=0402, SymbolName_1=RESISTOR
R12: library part R-US_R0603, "RESISTOR, American symbol", MPN=RK73B1JTTD241J, DeviceName=R0603, DeviceSetName=R-US_, GateName_1=G$1, LibraryName=rcl, POPULARITY=77, SPICEPREFIX=R, SymbolName_1=R-US
U1 U2 U3 U4: "DiodesZetex 74LVC1G17SE-7, Buffer, Push-Pull, Non-Inverting, 1.65  5.5 V, 5-Pin SOT-353   Source:  Datasheet", MANUFACTURER_NAME="Diodes Inc.", DeviceSetName=74LVC1G17SE-7, GateName_1=G$1, HEIGHT=1.1mm, LibraryName=74LVC1G17SE-7, MANUFACTURER_PART_NUMBER=74LVC1G17SE-7, MOUSER_PART_NUMBER=621-74LVC1G17SE-7, MOUSER_PRICE-STOCK=https://www.mouser.co.uk/ProductDetail/Diodes-Incorporated/74LVC1G17SE-7?qs=FRHfhEBFk1dzIcstjqNcyA%3D%3D, MPN=74LVC1G17SE-7, SymbolName_1=74LVC1G17SE-7
Z1 Z3: "Zener Diode 5.1V 5% 500mW SOD123 Diodes Inc MMSZ5231B-7-F Zener Diode, 5.1V 5% 0.5 W SMT 2-Pin SOD-123   Source:  Datasheet", MANUFACTURER_NAME="Diodes Inc.", DeviceSetName=MMSZ5231B-7-F, GateName_1=G$1, HEIGHT=1.45mm, LibraryName=MMSZ5231B-7-F, MANUFACTURER_PART_NUMBER=MMSZ5231B-7-F, MOUSER_PART_NUMBER=621-MMSZ5231B-F, MOUSER_PRICE-STOCK=https://www.mouser.co.uk/ProductDetail/Diodes-Incorporated/MMSZ5231B-7-F?qs=2ygBApjwyeMh7Sf0YL1qSw%3D%3D, MPN=MMSZ5231B-7-F, SymbolName_1=MMSZ5231B-7-F

## Via types
v1: diameter 20, hole 10, Top to Bottom, tented both sides, 33 vias
v2: diameter 18, hole 10, Top to Bottom, tented both sides, 27 vias
v3: diameter 36, hole 24, Top to Bottom, tented both sides, 6 vias
v4: diameter 30, hole 15, Top to Bottom, tented both sides, 4 vias
v5: diameter 25, hole 15, Top to Bottom, tented both sides, 1 vias

## Nets (pads, with @x,y where several pads share a name; then routed paths per layer and width w, separated by ;. In a path a pad name is that pad's centre, name@x,y a point inside that pad or via, vN(x,y) a via of type N, cw(c..) or ccw(c..) an arc to the next point about the centre after c; other vN are vias at no path point)
AIN: J2.3 JP6.2 R7.2 | length 222.9
  Top w10: v5(1044,829) 1044,833.06 1047.81,836.87 1047.81,886.89 J2.3
  Bottom w10: v5(1044,829) 1045.64,829 1057.36,840.72 1075.02,840.72 R7.2 1075.61,842.69 1075.61,861.54 1056.79,880.36 1056.79,925.21 JP6.2
AIN_INT: D5.1 IC3.1 R7.1 R9.1 Z2.3 | length 462.2
  Bottom w10: Z2.3 965.11,584.83 965.11,621.11 991,647 1049,647 1070,668 1070,683 1076,689 1112,689 1127.69,704.69 1127.69,730 1127.69,773 1127.69,790.34 1113.7,804.33 ; IC3.1@1042.77,798.43 1042.81,798.47 1107.84,798.47 1113.7,804.33 ; R7.1 1113.7,804.33
  other v1: 1071,810
AIN_OUT: D6.1 IC3.3 IC3.4 R8.1 | length 193.6
  Bottom w10: D6.1@1000,682.29 964.03,682.29 954.19,692.13 954.19,747.25 IC3.4 IC3.3@1042.77,747.25
AIN_S: JP6.1 R12.2 | length 83.3
  Bottom w10: JP6.1 1087,915.14 1094.5,907.64 1106.36,907.64 1114.46,899.54 R12.2@1152,899.54
EXT_VIN: D4.2 J2.1 Q1.1 Q1.2 Q1.5 Q1.6 Q1.7 | length 544.3
  Top w24: v3(775.59,1031.5) 817.5,1031.5 857.95,991.05 857.95,917.62 J2.1@871.8,903.77
  Bottom w10: Q1.1 Q1.7@775.59,1104.33 ; Q1.2 Q1.7@775.59,1129.92 ; Q1.6 Q1.7@775.59,1104.33 ; Q1.5 Q1.7@775.59,1129.92 ; Q1.7@775.59,1104.33 Q1.7 Q1.7@775.59,1129.92
  Bottom w24: Q1.7 v3(775.59,1031.5) D4.2
EXT_VIN_BST: C1.2 IC2.1 | length 253.4
  Bottom w16: IC2.1 877.95,1177.45 911.7,1177.45 911.7,1177.17 988.19,1177.17 988.19,1149.61 1066.93,1149.61 C1.2@1070.87,1153.54
EXT_VIN_COMP: C11.1 IC2.6 R2.1 | length 107.7
  Bottom w10: IC2.6 1153.54,1308.46 1153.54,1307.09 R2.1@1196.85,1307.09
EXT_VIN_COMP_CAP: C12.1 R2.2 | length 47.2
  Bottom w10: C12.1@1192.91,1224.41 1196.85,1224.41 R2.2@1196.85,1267.72
EXT_VIN_FB: C2.2 IC2.5 R1.2 R3.1 | length 362.2
  Bottom w10: R3.1@964.57,1413.39 1090.55,1413.39 IC2.5 1090.55,1350.39 1220.47,1350.39 R1.2@1220.47,1393.7
EXT_VIN_G: Q1.3 R4.1 Z1.2 | length 243.5
  Bottom w10: Q1.3 738.78,1200.79 740.16,1200.79 769.45,1200.79 769.45,1338.58 Z1.2
EXT_VIN_INT: C6.1 IC2.2 IC2.3 Q1.4 Q1.8 Z1.1 | length 182.5
  Bottom w24: Z1.1 799.21,1258.46 IC2.2 IC2.3
EXT_VIN_OUT: C2.1 C5.1 C7.2 C8.2 C9.2 D1.2 D3.1 J3.2 J3.5 J3.8 J3.11 L1.2 R1.1 | length 2081.2
  Top w24: L1.2 1114.17,1283.64 1137.62,1307.09 1294.49,1307.09 v3(1337.44,1350.03) 1340.68,1350.03 1343.04,1352.39 1486.29,1352.39 1491.53,1347.15 1502.47,1347.15 1520,1329.62 C5.1@1520,1297.14 ; J3.2@1295.58,662.99 1395.58,662.99 1495.58,662.99 1595.58,662.99 1663,730.41 1663,1182.14 1615.14,1230 1551.59,1230 1546.27,1235.32 1537.53,1235.32 C5.1@1537.53,1243.98
  Bottom w10: R1.1@1259.84,1393.7 1259.84,1349.33 1264.62,1344.55 1268.51,1344.55 1270.55,1342.52 1322.89,1342.52 1330.4,1350.03 v3(1337.44,1350.03)
  Bottom w20: J3.11@1625.77,645.25 D3.1
  Bottom w24: D1.2 1191,711.91 1210.49,692.42 1223.29,692.42 1246.53,669.18 1289.39,669.18 1295.58,662.99 J3.2@1290.7,662.99 ; v3(1337.44,1350.03) 1377.88,1350.03 1379.19,1351.34 1446.12,1351.34 1447.17,1352.39 1511.93,1352.39 C9.2 ; J3.11@1595.58,662.99 1608.03,662.99 J3.11@1625.77,645.25
EXT_VIN_SS: C10.1 IC2.4 | length 98.2
  Bottom w10: C10.1@814.96,1393.7 877.95,1393.7 IC2.4
EXT_VIN_SW: C1.1 IC2.8 L1.1 | length 291.3
  Top w24: L1.1 1004.5,1208.66 v3(1027.56,1185.61)
  Bottom w16: IC2.8 1110.24,1208.46 C1.1@1110.24,1153.54
  Bottom w24: v3(1027.56,1185.61) 1027.56,1185.04 1043.31,1185.04 1066.73,1208.46 IC2.8
GND: C3.1 C4.1 C5.2 C6.2 C7.1 C8.1 C9.1 C10.2 C11.2 C12.2 C13.1 C14.1 C15.1 C16.1 C17.1 C18.1 D2.2 D3.2 D4.1 D5.2 D6.2 D7.2 D8.2 D9.2 D10.2 D11.2 D12.2 D13.2 D14.2 D15.2 IC1.2 IC2.7 IC2.9 IC3.2 IC4.3 J2.2 J3.1 J3.4 J3.7 J3.10 J7.8 J9.8 R3.2 R4.2 R9.2 R12.1 R16.2 R17.2 R18.2 U1.3 U2.3 U3.3 U4.3 Z2.1 Z3.2 | length 1782.3
  Top w10: C14.1@1201.01,1188.74 C14.1@1202.26,1188.74
  Bottom w5: D14.2 1410,1111.11 v1@1410,1032.37 ; D12.2@1516.3,1108.77 D12.2
  Bottom w10: R4.2@740.16,1240.16 v2(740.16,1271.65) 740.16,1393.7 775.59,1393.7 775.59,1421.26 925.2,1421.26 R3.2@925.2,1413.39 ; C3.1@796.71,575.99 796.71,572.06 C3.1 ; C4.1@883.32,741.35 887.26,745.28 C4.1 ; C4.1@891.2,753.16 C4.1 ; v2(899.07,780.72) C4.1 ; C15.1@1009.31,847.65 1005.37,847.65 1005.37,772.84 IC3.2@1042.77,772.84 ; IC3.2 1044.9,773 D5.2 1088.31,770.06 R9.2@1088.31,730 ; IC2.7 1090.55,1255.91 1153.54,1255.91 ; C12.2@1153.54,1224.41 1153.54,1255.91 ; C11.2@1153.54,1267.72 1153.54,1255.91 ; U4.3 1410,1032.37 1410,953.63 1410,906.54 1417.05,906.54 1417.05,855.2 D15.2 ; D12.2 1520.24,1115.05 R17.2@1520.24,1146.54 ; D10.2 1604.75,1047.99 1600.94,1044.18 U2.3 v1@1630.47,1032.37
  Bottom w24: C6.2@942.91,1129.92 958.66,1114.17 v3(1035.43,1114.17) 1037.8,1114.17 D4.1 ; IC2.9 984.25,1258.46 IC2.7 ; v3(1317.25,1421.08) C7.1 C8.1 C9.1
  other v1: 847,543 1103.49,652.68 1666.86,696.09 1687.54,713.49 1041.62,715.15 1504,823 1616,823 1393,824 921.45,932.91 1116,941 1410,951 1292,961 1410,1031 1626,1031 955,1033 978,1073 1476,1174 1219.28,1199.74 1447,1237 1627,1260 1451,1299 1597,1358
  other v2: 523.62,712.6 523.62,814.96 918.76,847.65 1520.24,953.63 1164,1201 956.69,1240.16 988.19,1240.16 1019.68,1240.16 956.69,1271.65 988.19,1271.65 1019.68,1271.65 822.83,1295.28 956.69,1303.15 988.19,1303.15 1019.68,1303.15 956.69,1334.65 988.19,1334.65 1019.68,1334.65 720.47,1429.13 1759.84,1507.87
  other v3: 1573,1419
P6_ADC: JP1.2 R8.2 | length 504.3
  Top w10: v2(795.28,996.06) 831.24,960.1 831.24,826.24 843.48,814 913,814 936,791 936,734 v1(910,708)
  Bottom w10: v2(795.28,996.06) 795.53,995.81 JP1.2 ; R8.2@880.54,678 880.54,679.97 895.23,694.65 897.2,694.65 910,707.46 v1(910,708)
P6_ADC_INT: J1.7 JP1.1 | length 424.6
  Bottom w10: J1.7 614.17,714.17 614.17,893.7 633.86,913.39 755.91,913.39 763.53,921.01 JP1.1
P7_PWM: D10.1 JP2.2 R16.1 U2.2 | length 154.8
  Bottom w10: JP2.2 1575,1032.72 U2.2
P7_PWM_INT: J9.6 JP2.1 | length 573.8
  Bottom w6: JP2.1 1656,1187 1686,1157 1686,946 1718,914 1761,914 1790,885 1790,811.57 J9.6
P7_PWM_SERVO: J3.12 R13.2 | length 86.9
  Bottom w20: R13.2 1564.29,828.86 1564.29,804.71 J3.12
P7_PWM_SERVO_INT: D11.1 R13.1 U2.4 | length 131.8
  Bottom w10: R13.1@1559.61,896.54 1604.88,896.54 D11.1 1600.94,900.48 U2.4
P8_PWM: D12.1 JP3.2 R17.1 U3.2 | length 263.1
  Bottom w10: U3.2 1469.06,1036.31 1469.06,1095.11 JP3.2 1492.68,1095.11 ; D12.1 1492.68,1079.61 1492.68,1095.11 ; R17.1@1520.24,1185.91 1516.3,1185.91 1492.68,1162.29 1492.68,1095.11
P8_PWM_INT: J9.5 JP3.1 | length 929.2
  Bottom w6: JP3.1 1453.31,1179.31 1563,1289 1640,1289 1687.51,1336.51 1692.49,1336.51 1693,1336 1759,1336 1781.58,1313.42 1781.58,919.99 J9.5
P8_PWM_SERVO: J3.9 R14.2 | length 92.3
  Bottom w20: R14.2 1451.34,833.55 1458.46,826.42 1458.46,810.54 J3.9
P8_PWM_SERVO_INT: D13.1 R14.1 U3.4 | length 131.8
  Bottom w10: R14.1@1449.37,896.54 1494.65,896.54 D13.1 1490.71,900.48 U3.4
P9_PWM: D14.1 JP4.2 R18.1 U4.2 | length 202.5
  Bottom w10: R18.1 1282,1057.66 1300.09,1075.75 1300.09,1087.61 1307.59,1095.11 JP4.2 1326.95,1087.61 1346.88,1087.61 1354.88,1079.61 ; U4.2 1354.88,1079.61 ; D14.1 1354.88,1079.61
P9_PWM_INT: J9.4 JP4.1 | length 962.1
  Bottom w6: JP4.1 1331.95,1127.11 1341.45,1136.61 1341.45,1140.62 1349.89,1149.07 1401.07,1149.07 1563,1311 1623,1311 1668,1356 1758,1356 1795,1319 1795,1006.57 J9.4
P9_PWM_SERVO: J3.6 R15.2 | length 96.6
  Bottom w20: R15.2 1341.1,833.55 1348.22,826.42 1348.22,820.78 J3.6
P9_PWM_SERVO_INT: D15.1 R15.1 U4.4 | length 131.8
  Bottom w10: R15.1@1339.13,896.54 1384.41,896.54 D15.1 1380.47,900.48 U4.4
P10_FSYNC: D8.1 IC4.4 JP5.2 R6.2 U1.2 | length 351.1
  Top w10: IC4.4@1304.63,1149.37 IC4.4 1306.59,1242.88 1313,1249.29 v1(1313,1252)
  Bottom w6: JP5.2 1254.49,1285.51 1254.49,1257.51 1270.75,1241.25 D8.1@1270.75,1190 ; R6.2 1301.7,1252 v1(1313,1252) 1359,1252 1369.54,1262.54 1369.54,1283.91 U1.2
P10_FSYNC_INT: J9.3 JP5.1 | length 924.1
  Bottom w6: JP5.1 1284,1300.5 1293.5,1310 1299,1310 1311,1322 1607,1322 1659,1374 1801,1374 1884,1291 1884,1108.41 J9.3
SW: IC1.1 L2.2 | length 93.8
  Bottom w10: IC1.1 731.75,747.25 763.36,715.64 L2.2@763.36,705.91
SYNC: J3.3 JP7.2 | length 140.8
  Bottom w10: JP7.2 1202,793.29 1207.86,787.43 1257.72,787.43 1282.16,762.99 J3.3@1295.58,762.99
SYNC_IN: JP7.3 R11.2 | length 303.1
  Top w10: v1(1147,853) 1148,852 1274,852 1297,875 1297,912 1263.46,945.54 1263.46,958.24 R11.2@1259.7,962
  Bottom w10: v1(1147,853) 1149.71,853 1154.71,848 1162.5,848 1170,840.5 JP7.3
SYNC_IN_INT: D7.1 IC4.2 R5.2 R11.1 Z3.1 | length 330.3
  Top w6: R5.2 1203.94,1066 1223.49,1066 1227,1062.49 1227,1050 1242,1035 1276,1035 1281,1040 IC4.2
  Top w10: R5.2 1202.26,1026.99 1215.45,1013.79 1218.4,1013.79 1223.25,1008.95 D7.1 1222.3,1005.05 1222.3,962 1222.3,927.77 1233.45,916.62 1233.45,907.76 1243.21,898 Z3.1
SYNC_OUT: JP7.1 R10.2 | length 258.1
  Bottom w10: R10.2@1155,1032.54 1155.34,1032.2 1185.8,1032.2 1199,1019 1199,902 1234,867 JP7.1 ; R10.2@1155.97,1030.54 R10.2@1158.97,1030.54
SYNC_OUT_INT: D9.1 R10.1 U1.4 | length 355
  Bottom w6: D9.1 1134.32,1080.75 1153.03,1099.46 1155,1099.46 1220.46,1099.46 1293,1172 1378,1172 1393.71,1187.71 1393.71,1203.76 U1.4
V_BATT: C4.2 C13.2 C15.2 C16.2 C17.2 C18.2 IC1.4 IC3.5 R5.1 U1.5 U2.5 U3.5 U4.5 | length 521
  Top w10: R5.1@1202.26,1106.06 R5.1@1206.2,1110 ; C16.2 1338.87,965.13 v2(1352,952) ; v2(1465.12,953.63) 1464.62,954.13 1464.62,951.38 1475,941 C18.2@1475,932 ; v2(1575.35,953.63) 1575.74,954.02 C17.2@1575.74,926
  Bottom w10: IC1.4 845.92,861.43 891.2,816.15 C4.2 906.94,816.15 917.69,805.4 917.69,804.29 923.55,798.43 IC3.5 ; IC3.5@967.97,798.43 969.94,800.4 969.94,867.33 981.75,879.14 v2(1021.12,879.14) ; C13.2 1190.13,1134.58 1200.98,1123.72 v1(1201.55,1123.72) ; U4.5 1330.88,952.04 v2(1352,952) v2(1352,952) ; U3.5 v2(1465.12,953.63) ; U2.5 v2(1575.35,953.63)
  other v1: 1331.93,1193.45
VCC: C3.2 C14.2 D2.1 IC4.5 J1.8 L2.1 R6.1 Z2.2 | length 706
  Top w10: C14.2 1252.86,1151.92 IC4.5 1255.41,1213.21 1237.62,1231 v1(1218,1231)
  Layer 3 w10: 1137,1229 1137,1231
  Layer 3 w20: 1137,1231 v1(1218,1231)
  Bottom w10: D2.1 800.65,631.11 C3.2 C3.2@812.45,635.04 ; L2.1 810.35,703.38 833.27,680.47 833.27,661.71 823.2,651.65 823.2,645.79 C3.2@812.46,635.05 ; Z2.2@889.63,621.4 826.09,621.4 C3.2@812.45,635.04
  Bottom w20: J1.8 612.99,612.99 683.7,612.99 701.82,631.11 D2.1
  other v1: 833,625 833.27,662.5 839.5,705 840,738
VIN: D1.1 J9.7 | length 12.8
  Bottom w20: D1.1 D1.1@1191,576.09
  other v4: 1099,535 1057.72,553.9 1100,577 1068,611
pads on no net: FD1.1 FD2.1 FD3.1 FD4.1 FD5.1 FD6.1 FD7.1 FD8.1 IC1.3 IC1.5 IC4.1 J1.1 J1.2 J1.3 J1.4 J1.5 J1.6 J2.4 J2.5 J7.1 J7.2 J7.3 J7.4 J7.5 J7.6 J7.7 J8.1 J8.2 J8.3 J8.4 J8.5 J8.6 J8.7 J8.8 J9.1 J9.2 U1.1 U2.1 U3.1 U4.1

## Polygon pours and split planes (outlines as drawn)
GND on Bottom "Polygon_1_Net_GND" (solid, remove dead copper, pour order 2): 501.87,501.87 1899.7,501.87 1899.7,1553.24 501.87,1553.24
EXT_VIN_INT on Bottom "Polygon_1_Net_EXT_VIN_INT" (solid, remove dead copper, pour order 0): 778.46,1233.35 819.96,1233.35 819.96,1166.42 898.7,1166.42 898.7,1097.36 837.52,1097.36 837.52,1140.67 798.15,1140.67 798.15,1148.54 754.84,1148.54 754.84,1174.29 778.46,1174.29
GND on Layer 3 "GND_L03_P010" (solid, remove dead copper, pour order 10): 500,1551 500,500 1902,500 1902,1550
VIN on Layer 3 "VIN_L03_P009" (solid, remove dead copper, pour order 9): 1898.06,841 1013,841 1013,504 1897,504
V_BATT on Layer 3 "V_BATT_L03_P005" (solid, remove dead copper, pour order 5): 1000,894 1172.28,1011.28 1171.98,1212 1602,1212 1602,852 999,852
VCC on Layer 3 "VCC_L03_P004" (solid, remove dead copper, pour order 4): 500,1253 500,500 1000,500 1000,894 1172.28,1011.28 1172.28,1253
GND on Top "Polygon_2_Net_GND" (solid, remove dead copper, pour order 3): 497.94,497.94 1903.64,497.94 1903.64,1557.18 497.94,1557.18
GND on Layer 2 "GND_L02_P006" (solid, remove dead copper, pour order 6): 500,1551 500,500 1902,500 1902,1550

## Keep-outs
Keep-Out Layer:
  the board outline again, w0

## Other copper
Bottom:
  rectangle net VIN: 1025,517 1219,627

## Silkscreen, mask and mechanical layers (free items; w line width, h text height)
Top Overlay:
  drawing of 262 lines, arcs and shapes, not listed
  text "PWR - 6V to 36V" at 1035.43,1492.13 h27.2
  text "Servo" at 1684,1489 h27.2
  text "AIN - 0 to 5V or 4-20mA" at 1035.43,1444.88 h27.2
  text "Shield" at 1683,1444 h27.2
  text "P7-P10 - 0 to 5V I/O" at 1035.43,1397.64 h27.2
  text "R2" at 1686,1396 h27.2
  text "OpenMV" at 558,1384 h26.35
  text "PWR" at 838,994 h27.2
  text "GND" at 941,994 h27.2
  text "AIN" at 1040,994 h27.2
  text "P10" at 1295.28,830.71 h27.2
  text "P9" at 1409.45,830.71 h27.2
  text "P8" at 1511.81,830.71 h27.2
  text "P7" at 1614.17,830.71 h27.2
Bottom Overlay:
  text "Servo Shield R2" at 1185.04,1492.13 h27.2
  text "https://openmv.io" at 1185.04,1444.88 h27.2
  text "8.21.23" at 1185.04,1397.64 h27.2
  text "FSYNC" at 1318,1382 h27.2 r270
  text "P10" at 1279,1344 h27.2 r270
  text "P7" at 1600,1243 h27.2
  text "P8" at 1463,1167 h27.2
  text "P9" at 1265,1102 h27.2
  text "I" at 1311.02,972.44 h27.2
  text "O" at 1381.89,972.44 h27.2
  text "ADC" at 922,915 h27.2
  text "mA" at 992.35,904.23 h27.2 r270
  text "SYN" at 1252,880 h27.2
  text "P6" at 921,868 h27.2

## Text inside footprints (layer, text, board x,y; h text height)
C5: Top Overlay "K" at 1555.78,1308.22 h30 r270